# Altium PCB BPC_PWR_v1.1_Panel.PCBDOC
Units mm, origin at the board's own origin, x right, y up, seen from the top; angles counter-clockwise.
Board outline 380 x 230 mm, 4 copper layers (L1 - Top, L2 - GND, L3 - GND, L4 - Bottom), stack 1.564 mm thick; 12 components, 120 nets, 12 pads, 0 vias.
Unrouted connection lines stored in the file: 6.
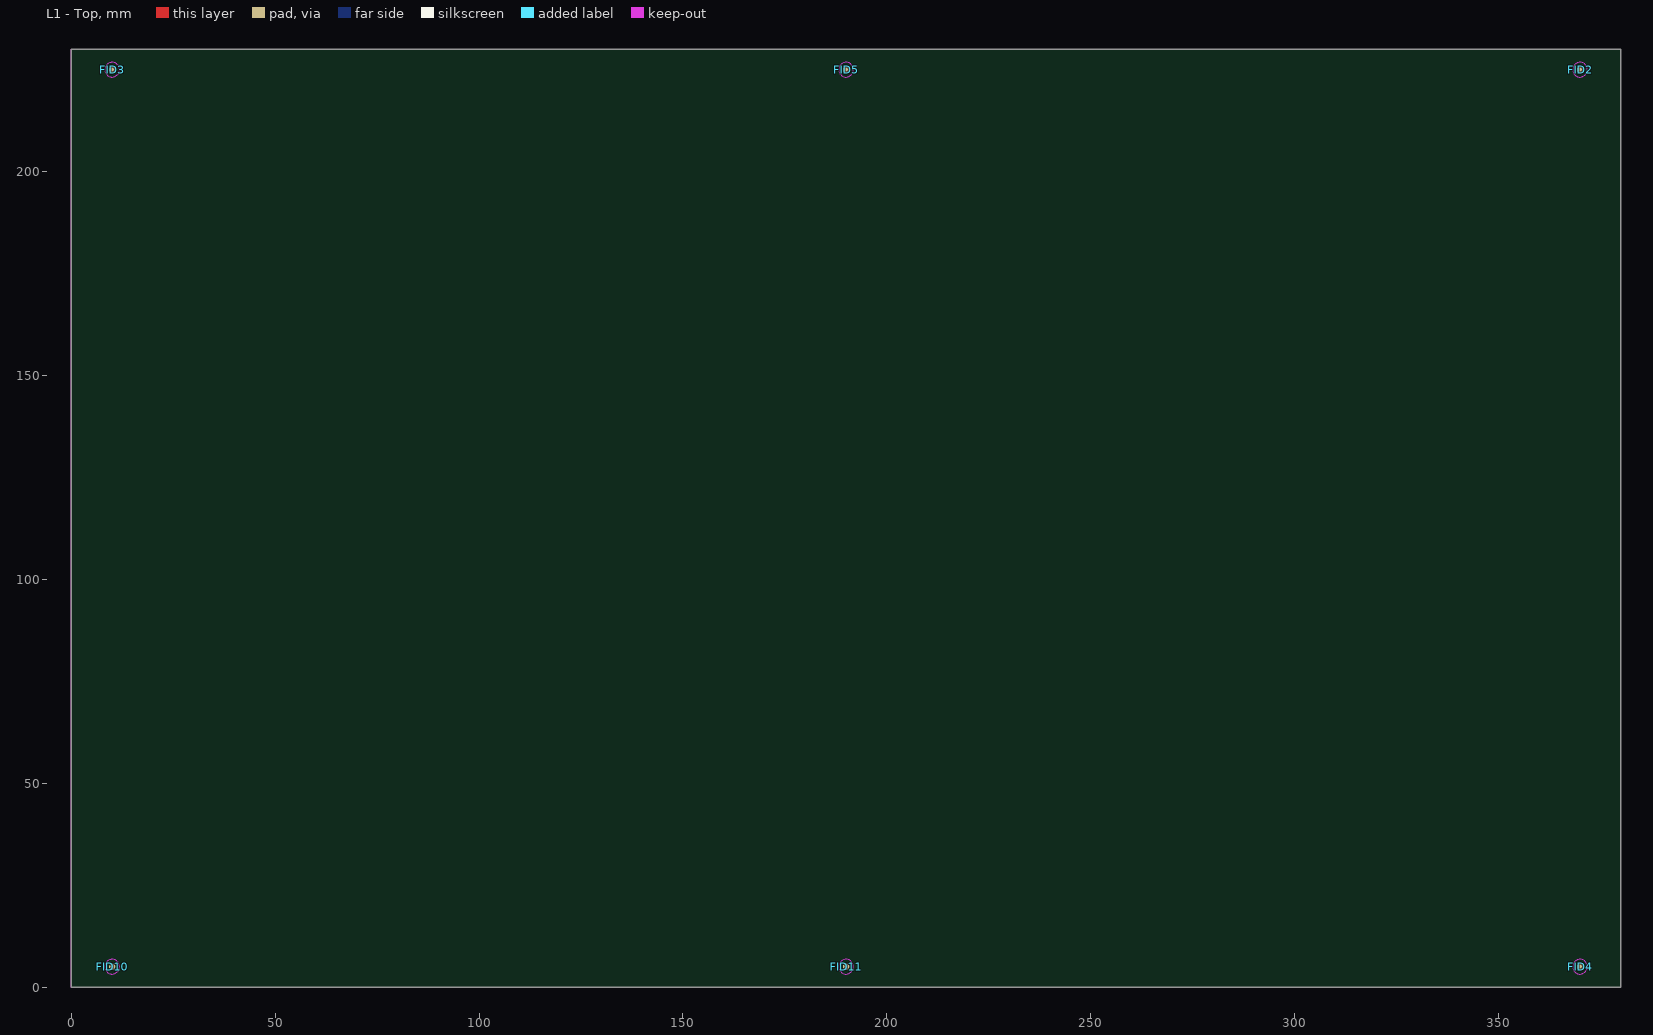
[diagram p0: L1 - Top view]
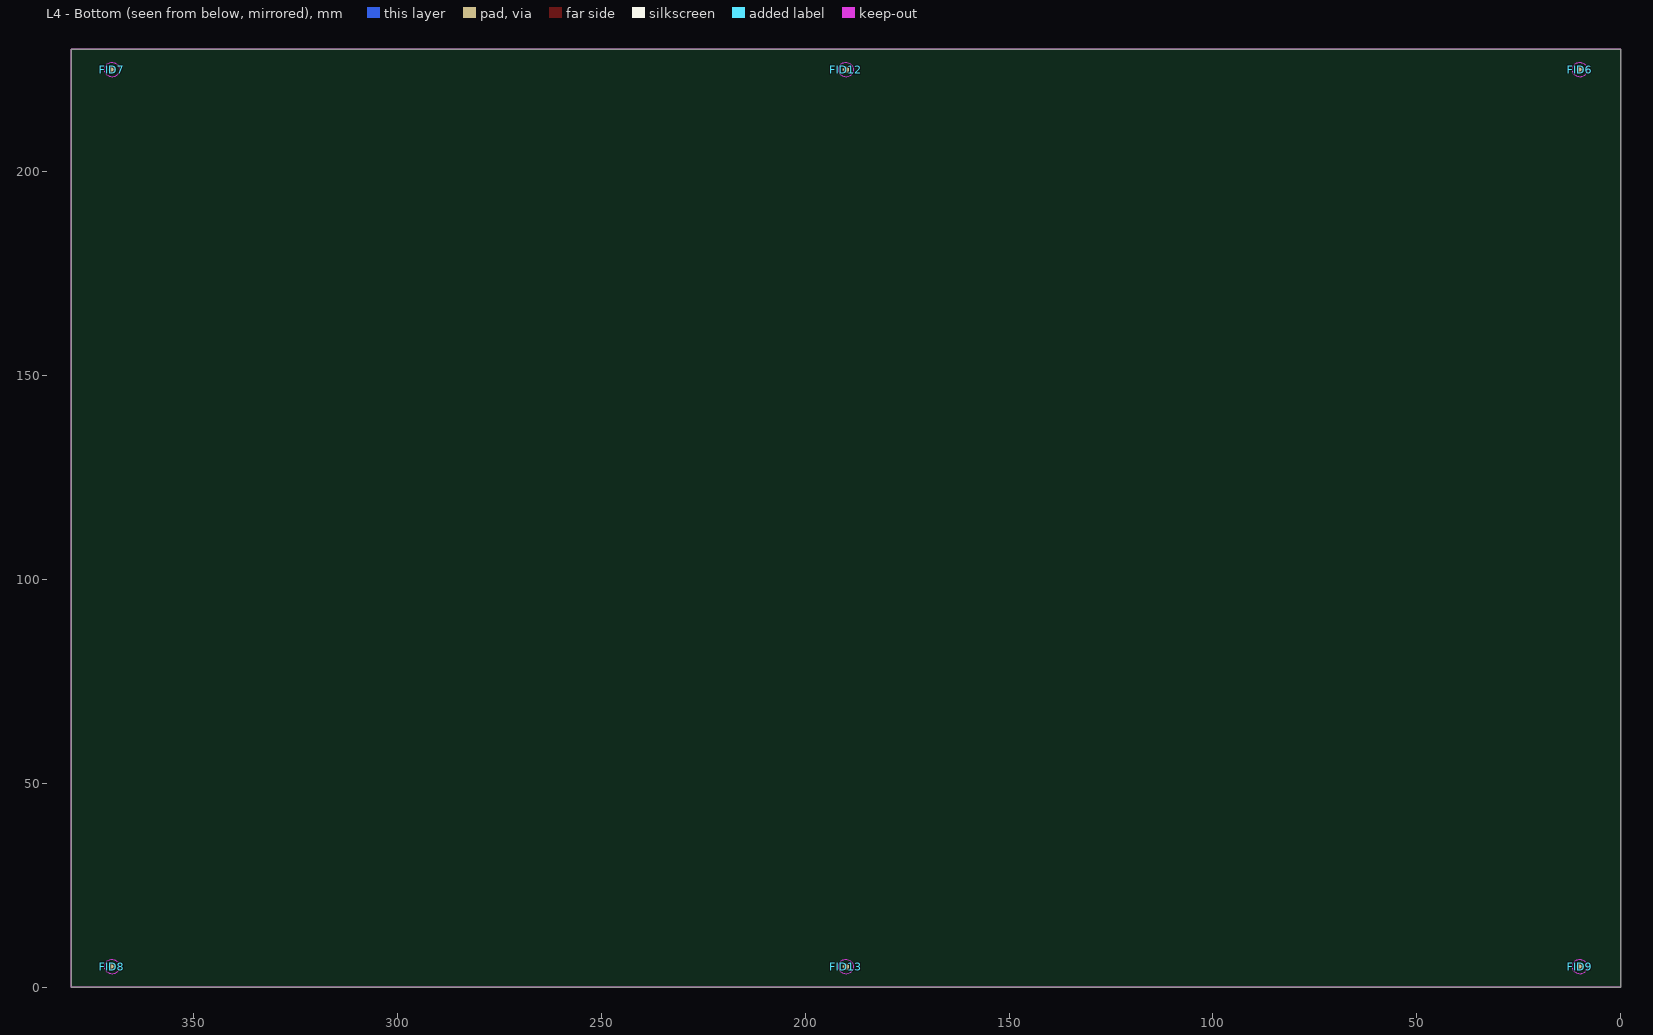
[diagram p1: L4 - Bottom view, seen from below]

## Layer stack, top to bottom
Top Solder: solder mask 0.015, Solder Resist, Dk 3.8
L1 - Top: signal copper 0.035
Dielectric1: prepreg 0.0994, FR-4, Dk 4.05
L2 - GND: signal copper 0.0152
Dielectric2: core 1.265, FR-4, Dk 4.6
L3 - GND: signal copper 0.0152
Dielectric3: prepreg 0.0994, FR-4, Dk 4.05
L4 - Bottom: signal copper 0.035
Bottom Solder: solder mask 0.015, Solder Resist, Dk 3.8

## Board outline
0,0 380,0 380,230 0,230

## Design rules (kind name [scope] priority, off if disabled: settings)
BoardOutlineClearance [All] p1: gap=0.25 ignorepadtopadclearanceinfootprint=FALSE except(0: Arc-SplitContinuation Track-SplitContinuation SMDPad-SplitContinuation THPad-SplitContinuation Via-SplitContinuation Fill-SplitContinuation Poly-SplitContinuation Region-SplitContinuation Text-SplitContinuation)
Clearance Clearance_TH-DSBGA [HasFootprint('DSBGA-12')] p1: gap=0.15 ignorepadtopadclearanceinfootprint=FALSE except(0: Arc-Hole Track-Hole SMDPad-Hole THPad-Hole Via-Hole Fill-Hole Poly-Hole Region-Hole Text-Hole)
Clearance Clearance_TOP_BOT_Poly [All vs OnBottomLayer or OnTopLayer] p2: gap=0.18 ignorepadtopadclearanceinfootprint=TRUE except(0: Arc-Hole Track-Hole SMDPad-Hole THPad-Hole Via-Hole Fill-Hole Poly-Hole Region-Hole Text-Hole; 0.165: Track-Track; 0.3: Arc-Poly Track-Poly SMDPad-Poly THPad-Poly Via-Poly Fill-Poly Poly-Poly)
Clearance "Clearance - Keep-out to Edge" [OnLayer('Keep-Out Layer') vs InPolygon] p3: gap=0.254 ignorepadtopadclearanceinfootprint=TRUE
Clearance "Clearance - Default - DEFAULT - Net" [All] p4: gap=0.2 ignorepadtopadclearanceinfootprint=TRUE except(0: Arc-Hole Track-Hole SMDPad-Hole THPad-Hole Via-Hole Fill-Hole Poly-Hole Region-Hole Text-Hole)
Clearance Clearance-xPP-xTP-xTT [All] p5: gap=0.15 ignorepadtopadclearanceinfootprint=FALSE except(0: Arc-Hole Track-Hole SMDPad-Hole THPad-Hole Via-Hole Fill-Hole Poly-Hole Region-Hole Text-Hole)
ComponentClearance "ComponentClearance - Default - DEFAULT" [All] p1: gap=0.14 collisioncheckmode=3 verticalgap=0.254 showdistances=FALSE
DiffPairsRouting DiffPair_CAN2 [InDifferentialPair('CAN2')] p1: maxlimit=0.203 minlimit=0.203 mostfreqgap=0.203 toplayer_minwidth=0.122 toplayer_maxwidth=0.122 toplayer_prefwidth=0.122 midlayer1_minwidth=0.122 midlayer1_maxwidth=0.122 midlayer1_prefwidth=0.122 midlayer2_minwidth=0.122 midlayer2_maxwidth=0.122 midlayer2_prefwidth=0.122 bottomlayer_minwidth=0.122 bottomlayer_maxwidth=0.122 bottomlayer_prefwidth=0.122 maxuncoupledlength=0
DiffPairsRouting [All] p2: maxlimit=0.25 minlimit=0.25 mostfreqgap=0.25 toplayer_minwidth=0.381 toplayer_maxwidth=0.381 toplayer_prefwidth=0.381 midlayer1_minwidth=0.381 midlayer1_maxwidth=0.381 midlayer1_prefwidth=0.381 midlayer2_minwidth=0.381 midlayer2_maxwidth=0.381 midlayer2_prefwidth=0.381 bottomlayer_minwidth=0.381 bottomlayer_maxwidth=0.381 bottomlayer_prefwidth=0.381 maxuncoupledlength=12.5
FanoutControl Fanout_Small [(CompPinCount < 5)] p1: bgadir=Out bgaviamode=Centered fanoutstyle=Auto fanoutdirection=OutThenIn viagrid=0.025 // Fanout_Small (Default Rule)
FanoutControl Fanout_BGA [IsBGA] p2: bgadir=Out bgaviamode=Centered fanoutstyle=Auto fanoutdirection=Alternating viagrid=0.025 // Fanout_BGA (Default Rule)
FanoutControl Fanout_LCC [IsLCC] p3: bgadir=Out bgaviamode=Centered fanoutstyle=Auto fanoutdirection=Alternating viagrid=0.025 // Fanout_LCC (Default Rule)
FanoutControl Fanout_SOIC [IsSOIC] p4: bgadir=Out bgaviamode=Centered fanoutstyle=Auto fanoutdirection=Alternating viagrid=0.025 // Fanout_SOIC (Default Rule)
Height [All] p1: minheight=0 maxheight=25 prefheight=12.5
HoleSize HoleSize-PTH [All] p1: absolutevalues=TRUE maxlimit=3 minlimit=0.25 maxpercent=80.000 minpercent=20.000
HoleToHoleClearance [All] p1: gap=0.35 allowstackedmicrovias=TRUE
Length "Default Length" [All] p1: maxlimit=1270 minlimit=0
MatchedLengths [InFromToClass('JTAG')] p1: tolerance=0.127 checknetsindiffpair=FALSE checkdiffpairvsdiffpair=TRUE checkxsignals=TRUE checkothers=TRUE
MatchedLengths DiffPair_DIF100MatchedLengths [InDifferentialPairClass('DIFF100')] p2: tolerance=0.127 checknetsindiffpair=TRUE checkdiffpairvsdiffpair=FALSE checkxsignals=FALSE checkothers=FALSE
MaxMinImpedance "Default Impedance" [All] p1: minimum=50.00 maximum=150.0
MinimumAnnularRing "Minimum IAR  >0.45mm" [((ObjectKind = 'Pad') OR (ObjectKind = 'Via')) And (Layer = 'MultiLayer') And (HoleDiameter > AsMM(0.45))] p1: minimumring=0.15 // minimum inner annular ring for pads > 0.45mm finished hole size
MinimumAnnularRing "Minimum IAR <=0.45mm" [((ObjectKind = 'Pad') OR (ObjectKind = 'Via')) And (Layer = 'MultiLayer') And (HoleDiameter <= AsMM(0.45))] p2: minimumring=0.15 // minimum inner annular ring for pads <= 0.45mm finished hole size
MinimumSolderMaskSliver [All] p1: minsoldermaskwidth=0.08
ParallelSegment "Default Parallel Segment Adjasent" [All] p1: limit=25.4 gap=5.08
ParallelSegment "Default Parallel Segment Same Layer" [All] p2: limit=25.4 gap=5.08
PlaneClearance PlaneClearance-IPI [All] p1: clearance=0.25
PlaneClearance [All] p2: clearance=0.12
PlaneConnect [All] p1: planeconnectstyle=Relief reliefexpansion=0.175 reliefentries=4 reliefconductorwidth=0.2 reliefairgap=0.2
PlaneConnect "Default PlaneConnect" [All] p2: planeconnectstyle=Direct reliefexpansion=0.508 reliefentries=4 reliefconductorwidth=0.254 reliefairgap=0.254
PolygonConnect PolygonConnect_DirectCONN [InPadClass('Direct_CONN')] p1: connectstyle=Direct reliefconductorwidth=0.254 reliefentries=4 polygonreliefangle="90 Angle" airgapwidth=0.254
PolygonConnect PolygonConnect_relief_top [IsNamedPolygon('15V_LC_L1') or IsNamedPolygon('15V_DCDC_L1') or IsNamedPolygon('15V_L1') or IsNamedPolygon('15V_OUT_L1') or IsNamedPolygon('3V6_DCDC_L1') or IsNamedPolygon('GND_PE_DOWN_L1') or IsNamedPolygon('GND_PE_DOWN_L4') or IsNamedPolygon('GND_24V_L1') or IsNamedPolygon('GND_24V_L4') or IsNamedPolygon('GND_-IN_L1') or IsNamedPolygon('GND_-IN_L4') or IsNamedPolygon('GND_PE_UP_L1') or IsNamedPolygon('GND_L1_Whole') or IsNamedPolygon('GND_L4_Whole') or IsNamedPolygon('TS_UP_Izvlakac') or IsNamedPolygon('GND_L3_Whole') or IsNamedPolygon('3V3_L4') or IsNamedPolygon('3V6_L1') vs (IsVia and (ViaDiameter=0.62)) or IsPad] p2: connectstyle=Relief reliefconductorwidth=0.254 reliefentries=4 polygonreliefangle="90 Angle" airgapwidth=0.254
PolygonConnect PolygonConnect_relief_top_1 [IsNamedPolygon ('TS_UP_Izvlakac') or IsNamedPolygon('GND_L3_Whole')  or IsNamedPolygon('GND_L1_Whole') or IsNamedPolygon('GND_L4_Whole') vs (IsVia and (ViaDiameter=0.6)) or IsPad] p3: connectstyle=Relief reliefconductorwidth=0.254 reliefentries=4 polygonreliefangle="90 Angle" airgapwidth=0.254
PolygonConnect PolygonConnect_Direct_Via_0.61 [IsNamedPolygon('GND_-IN_L1') or  IsNamedPolygon('GND_-IN_L2') or  IsNamedPolygon('GND_-IN_L3') or IsNamedPolygon('GND_-IN_L4') or  IsNamedPolygon('GND_L1_Whole') or IsNamedPolygon('GND_L2_Whole') or IsNamedPolygon('GND_L3_Whole') or IsNamedPolygon('GND_L4_Whole') or   IsNamedPolygon('3V3_L4') or IsNamedPolygon('3V3_L4_3') vs (IsVia and (ViaDiameter=0.6)) or IsPad] p4: connectstyle=Relief reliefconductorwidth=0.2 reliefentries=4 polygonreliefangle="90 Angle" airgapwidth=0.2
PolygonConnect "PolygonConnect - Default SMT" [IsSMTPin] p5: connectstyle=Direct reliefconductorwidth=0.254 reliefentries=4 polygonreliefangle="45 Angle" airgapwidth=0.152
PolygonConnect "PolygonConnect - Default Pad" [All] p6: connectstyle=Direct reliefconductorwidth=0.1 reliefentries=4 polygonreliefangle="45 Angle" airgapwidth=0.1
RoutingCorners [All] p1: cornerstyle=45-Degree minsetback=2.5 maxsetback=2.5
RoutingLayers "RoutingLayers - Default - DEFAULT" [All] p1: top layer_v5=TRUE mid layer 1_v5=TRUE mid layer 2_v5=TRUE bottom layer_v5=TRUE
RoutingPriority "RoutingPriority - Default - DEFAULT" [All] p1: routingpriority=3
RoutingTopology "Default Routing Topology" [All] p2: topology=Shortest
RoutingVias "RoutingVias > 0.45mm" [(ObjectKind = 'Via') And (HoleDiameter > AsMM(0.45))] p1: holewidth=0.5 width=0.85 viastyle="Through Hole" minholewidth=0.3 minwidth=0.6 maxholewidth=0.9 maxwidth=1.25 // finishet hole size > 0.45mm
RoutingVias "RoutingVias <= 0.45mm" [(ObjectKind = 'Via') And (HoleDiameter <= AsMM(0.45))] p2: holewidth=0.3 width=0.65 viastyle="Through Hole" minholewidth=0.25 minwidth=0.6 maxholewidth=0.45 maxwidth=0.8 // finishet hole size <= 0.45mm
SMDToCorner "SMDToCorner - Default - DEFAULT" [All] p1: distance=19685
SilkToSilkClearance [All] p1: silktosilkclearance=0.01
SilkToSolderMaskClearance [IsPad] p1: minsilkscreentomaskgap=0.05 clearancetoexposedcopper=TRUE
SolderMaskExpansion [All] p1: expansion=0 istentingtop=FALSE
UnRoutedNet [All] p1: checkbadconnections=TRUE
Width "Width - Net - GND" [InNet('GND') or InNet('GND_PE') or InNet('GND_READOUT') or InNet('GND_SS')] p1: maxlimit=4 minlimit=0.2 preferedwidth=0.3 minimp=50.000000 maximp=50.000000 favimp=50.000000
Width "Width - Net - PWR" [InNet('+15V') or InNet('+15V_L') or InNet('+15V_READOUT') or InNet('+15V_READOUT_FUSE') or InNet('+15V_SS') or InNet('+15V_SS_CONN') or InNet('+15V_SS_FUSE') or InNet('+15V_SS_FUSE1') or InNet('+3V3') or InNet('+3V3_READOUT') or InNet('+3V3_SS') or InNet('+V3P3OUT')] p2: maxlimit=4 minlimit=0.2 preferedwidth=0.3 minimp=50.000000 maximp=50.000000 favimp=50.000000
Width "Default Width" [All] p3: maxlimit=4 minlimit=0.147 preferedwidth=0.147 minimp=50.000000 maximp=50.000000 favimp=50.000000
12 further rules are at their usual default settings.

## Classes and differential pairs
net class KADR_FIL[0..3]: KADR_FIL0 KADR_FIL1 KADR_FIL2 KADR_FIL3
component class DCDC: HW? ms
differential pair CAN2: +CAN2_P -CAN2_N

## Components (designator, comment, footprint, x,y, rotation, side; value= is the part's Value field where it differs from the comment)
FID2 "Fiducial Mark Round 1.6mm" FIDUCIAL_3.2_1.6 370.025,225 r0 top
FID3 "Fiducial Mark Round 1.6mm" FIDUCIAL_3.2_1.6 10.025,225 r0 top (schematic designator FID2)
FID4 "Fiducial Mark Round 1.6mm" FIDUCIAL_3.2_1.6 370.025,5 r0 top (schematic designator FID2)
FID5 "Fiducial Mark Round 1.6mm" FIDUCIAL_3.2_1.6 190.025,225 r0 top (schematic designator FID2)
FID6 "Fiducial Mark Round 1.6mm" FIDUCIAL_3.2_1.6 10.025,225 r180 bottom (schematic designator FID2)
FID7 "Fiducial Mark Round 1.6mm" FIDUCIAL_3.2_1.6 370.025,225 r180 bottom (schematic designator FID2)
FID8 "Fiducial Mark Round 1.6mm" FIDUCIAL_3.2_1.6 370.025,5 r180 bottom (schematic designator FID2)
FID9 "Fiducial Mark Round 1.6mm" FIDUCIAL_3.2_1.6 10.025,5 r180 bottom (schematic designator FID2)
FID10 "Fiducial Mark Round 1.6mm" FIDUCIAL_3.2_1.6 10.025,5 r0 top (schematic designator FID2)
FID11 "Fiducial Mark Round 1.6mm" FIDUCIAL_3.2_1.6 190.025,5 r0 top (schematic designator FID2)
FID12 "Fiducial Mark Round 1.6mm" FIDUCIAL_3.2_1.6 190.025,225 r180 bottom (schematic designator FID2)
FID13 "Fiducial Mark Round 1.6mm" FIDUCIAL_3.2_1.6 190.025,5 r180 bottom (schematic designator FID2)

## Footprints (in the part's own frame and the unit in brackets; to place one, negate y for a bottom-side part, rotate by r counter-clockwise, add the part's x,y. Pads: shape width x height; smd on the part's side, far side on the other; paste and mask are expansions set on the pad)
FIDUCIAL_3.2_1.6 [mil]
  round 63 smd paste-31.5 mask+31.5: 0(0,0)
  L1 - Top keep-out circle w10: c0,0 r70.87

## Part data
FID2 FID3 FID4 FID5 FID6 FID7 FID8 FID9 FID10 FID11 FID12 FID13: library part "Fiducial 1.6mm Round MS", Package=N/A, Last Revision Date=27.11.2020., Mounting=N/A

## Nets (pads, with @x,y where several pads share a name; then routed paths per layer and width w, separated by ;. In a path a pad name is that pad's centre, name@x,y a point inside that pad or via, vN(x,y) a via of type N, cw(c..) or ccw(c..) an arc to the next point about the centre after c; other vN are vias at no path point)
+3V3: 
+3V6: 
+3V6_DCDC: 
+3V6_DCDC_SW: 
+15V: 
+15V_DCDC: 
+15V_LC: 
+15V_OUT: 
+24V: 
+24V_+IN: 
+24V_CMCK: 
+24V_DIO: 
+24V_FIL_L: 
+24V_FUSE: 
+24V_L: 
+24V_SW: 
+In: 
-In: 
/24V_PRESENT: 
/ALERT_PWR: 
/FLTB: 
/FT_VICOR: 
/PWR_GOOD_TPS: 
BLEEDER_ON_OFF: 
BOOT0: 
CAN2_N: 
CAN2_P: 
CAN_FAULT: 
DCAN_RX: 
DCAN_TX: 
EN: 
FB_3V6: 
FT: 
GATE: 
GND: 
GND_24V: 
GND_-IN: 
GND_PE_DOWN: 
GND_PE_UP: 
KADR0: 
KADR1: 
KADR2: 
KADR3: 
KADR_FIL0: 
KADR_FIL1: 
KADR_FIL2: 
KADR_FIL3: 
LED_ERR: 
LED_PWR_OK: 
LED_RUN: 
NetC4_2: 
NetC5_2: 
NetC6_2: 
NetC13_1: 
NetC13_2: 
NetC36_1: 
NetC36_2: 
NetC49_1: 
NetC50_1: 
NetC51_2: 
NetC52_1: 
NetC53_2: 
NetC60_2: 
NetC79_2: 
NetC80_1: 
NetC80_2: 
NetC81_1: 
NetC81_2: 
NetC82_2: 
NetC84_1: 
NetD3_K: 
NetD4_K: 
NetD11_A: 
NetD12_A: 
NetD12_K: 
NetFB1_2: 
NetFB2_2: 
NetL5_2: 
NetLED1_A: 
NetLED4_K: 
NetLED_ERR1_K: 
NetLED_RUN1_K: 
NetQ2_3: 
NetQ3_3: 
NetQ4_3: 
NetQ5_1: 
NetQ5_3: 
NetQ6_1: 
NetQ6_3: 
NetR14_1: 
NetR29_1: 
NetR41_2: 
NetR80_1: 
NetR81_1: 
NetR88_2: 
NetRT1_2: 
nRST: 
nTEMP_ALERT: 
OV: 
PC14_OSC32_IN: 
PC15_OSC32_OUT: 
PF0_OSC_IN: 
PF1_OSC_OUT: 
PG_3V3: 
SCL: 
SDA: 
STAT: 
SYS_SWCLK: 
SYS_SWDIO: 
TEMP_ANALOG_SENSOR: 
TR: 
UART_CTS: 
UART_CTS_232: 
UART_RTS: 
UART_RTS_232: 
UART_RX: 
UART_RX_232: 
UART_TX: 
UART_TX_232: 
UV: 
pads on no net: FID2.0 FID3.0 FID4.0 FID5.0 FID6.0 FID7.0 FID8.0 FID9.0 FID10.0 FID11.0 FID12.0 FID13.0

## Keep-outs
KeepOutLayer:
  the board outline again, w0.2

## Silkscreen, mask and mechanical layers (free items; w line width, h text height)
Instructions (V-Cut):
  lines w0.2: -3.825,109.95 -0.95,109.95 ; -3.8,220 -0.925,220 ; -3.725,120.025 -0.85,120.025 ; -3.525,9.975 -0.65,9.975 ; -1.55,109.625 -0.95,109.95 ; -1.55,110.25 -0.95,109.95 ; -1.525,219.675 -0.925,220 ; -1.525,220.3 -0.925,220 ; -1.45,119.7 -0.85,120.025 ; -1.45,120.325 -0.85,120.025 ; -1.25,9.65 -0.65,9.975 ; -1.25,10.275 -0.65,9.975 ; 0,10 380,10 ; 0,110 380,110 ; 0,120 380,120 ; 0,220 380,220 ; 19.7,-0.925 20,-0.325 ; 20,-3.2 20,-0.325 ; 20,0 20,230 ; 20.325,-0.925 20,-0.325 ; 179.75,-1.15 180.05,-0.55 ; 180,0 180,230 ; 180.05,-3.425 180.05,-0.55 ; 180.375,-1.15 180.05,-0.55 ; 199.7,-1.325 200,-0.725 ; 200,-3.6 200,-0.725 ; 200,0 200,230 ; 200.325,-1.325 200,-0.725 ; 359.7,-1.175 360,-0.575 ; 360,-3.45 360,-0.575 ; 360,0 360,230 ; 360.325,-1.175 360,-0.575
  text "V-Cut" at -11.409,219.229 h3
  text "V-Cut" at -11.334,119.254 h3
  text "V-Cut" at -11.434,109.179 h3
  text "V-Cut" at -11.134,9.204 h3
  text "V-Cut" at 16.525,-5.342 h3
  text "V-Cut" at 176.575,-5.567 h3
  text "V-Cut" at 356.525,-5.592 h3
  text "V-Cut" at 196.525,-5.742 h3
Panel Details:
  lines w0: 421.786,181.863 423.691,181.863
  lines w0.2: 421.786,164.353 423.756,166.193 ; 421.786,166.193 423.691,164.353 ; 421.786,171.353 423.756,173.193 ; 421.786,173.193 423.691,171.353 ; 421.786,174.863 423.756,176.703 ; 421.786,176.703 423.691,174.863 ; 421.786,181.863 423.756,183.703 ; 421.786,183.703 423.691,181.863 ; 421.786,185.353 423.756,187.193 ; 421.786,187.193 423.691,185.353
  lines w0.508: 421.916,160.863 421.786,160.863 ; 421.916,164.353 421.786,164.353 ; 421.916,167.863 421.786,167.863 ; 421.916,171.353 421.786,171.353 ; 421.916,174.863 421.786,174.863 ; 421.916,178.353 421.786,178.353 ; 421.916,181.863 421.786,181.863 ; 421.916,187.193 421.786,187.193 ; 423.626,160.863 423.756,160.863 ; 423.626,164.353 423.756,164.353 ; 423.626,167.863 423.756,167.863 ; 423.626,171.353 423.756,171.353 ; 423.626,174.863 423.756,174.863 ; 423.626,178.353 423.756,178.353 ; 423.626,181.863 423.756,181.863 ; 421.786,160.863 421.786,162.703 423.756,162.703 423.756,160.863 ; 421.786,160.863 423.756,160.863 ; 421.786,164.353 421.786,166.193 423.756,166.193 423.756,164.353 ; 421.786,164.353 423.756,164.353 ; 421.786,167.863 421.786,169.703 423.756,169.703 423.756,167.863 ; 421.786,167.863 423.756,167.863 ; 421.786,171.353 423.756,171.353 ; 421.786,171.353 421.786,173.193 423.756,173.193 423.756,171.353 ; 421.786,174.863 423.756,174.863 ; 421.786,174.863 421.786,176.703 423.756,176.703 423.756,174.863 ; 421.786,178.353 423.756,178.353 ; 421.786,178.353 421.786,180.193 423.756,180.193 423.756,178.353 ; 421.786,181.863 423.756,181.863 ; 421.786,181.863 421.786,183.703 423.756,183.703 423.756,181.863 ; 421.786,187.193 423.756,187.193 423.756,185.353 421.786,185.353 421.786,187.193
  text "Panel PCB, ToDo list:" at 421.331,190.032 h5
  text "Hide single PCB mechanical layers" at 426.466,185.583 h2.5
  text "Board outline in the BoardOutline layer" at 426.466,182.093 h2.5
  text "Panel type in the BoardOutline layer" at 426.466,178.583 h2.5
  text "Dimensions in the Panel Dimension layer" at 426.466,175.093 h2.5
  text "Fiducials" at 426.466,171.583 h2.5
  text "Layer Markings in Copper Layers" at 426.466,168.093 h2.5
  text "Stackup Legend in the Panel PCB Assembly Notes layer" at 426.466,164.583 h2.5
  text "Gerber Identification in the GerberIDPanel layer." at 426.466,161.093 h2.5
Panel PCB Assembly Notes:
  drawing of 196 lines, arcs and shapes, not listed
  text "Layer" at 429.623,126.573 h1.52
  text "Name" at 436.222,126.573 h1.52
  text "Material" at 449.3,126.573 h1.52
  text "Thickness" at 460.999,126.573 h1.52
  text "Constant" at 470.62,126.573 h1.52
  text "Board Layer Stack" at 479.496,126.573 h1.52
  text "Top Overlay" at 436.222,123.525 h1.52
  text "Top Solder" at 436.222,120.477 h1.52
  text "Solder Resist" at 449.3,120.477 h1.52
  text "0.59mil" at 460.999,120.477 h1.52
  text "3.8" at 470.62,120.477 h1.52
  text "1" at 429.623,117.429 h1.52
  text "L1 - Top" at 436.222,117.429 h1.52
  text "1.38mil" at 460.999,117.429 h1.52
  text "Dielectric1" at 436.222,114.381 h1.52
  text "FR-4" at 449.3,114.381 h1.52
  text "3.91mil" at 460.999,114.381 h1.52
  text "4.05" at 470.62,114.381 h1.52
  text "2" at 429.623,111.333 h1.52
  text "L2 - GND" at 436.222,111.333 h1.52
  text "0.60mil" at 460.999,111.333 h1.52
  text "Dielectric2" at 436.222,108.285 h1.52
  text "FR-4" at 449.3,108.285 h1.52
  text "49.80mil" at 460.999,108.285 h1.52
  text "4.6" at 470.62,108.285 h1.52
  text "3" at 429.623,105.237 h1.52
  text "L3 - GND" at 436.222,105.237 h1.52
  text "0.60mil" at 460.999,105.237 h1.52
  text "Dielectric3" at 436.222,102.189 h1.52
  text "FR-4" at 449.3,102.189 h1.52
  text "3.91mil" at 460.999,102.189 h1.52
  text "4.05" at 470.62,102.189 h1.52
  text "4" at 429.623,99.141 h1.52
  text "L4 - Bottom" at 436.222,99.141 h1.52
  text "1.38mil" at 460.999,99.141 h1.52
  text "Bottom Solder" at 436.222,96.093 h1.52
  text "Solder Resist" at 449.3,96.093 h1.52
  text "0.59mil" at 460.999,96.093 h1.52
  text "3.8" at 470.62,96.093 h1.52
  text "Bottom Overlay" at 436.222,93.045 h1.52
  text "Top/Bottom Copper Thickness:" at 428.504,88.423 h2
  text "0.038mm after plating" at 458.825,88.35 h2
  text "1.594mm" at 458.829,85.473 h2
  text "Total Board Thickness:" at 428.544,85.443 h2
  text "ENIG" at 458.829,82.435 h2
  text "Surface Finish:" at 428.544,82.398 h2
  text "Solder Mask Color:" at 428.544,79.398 h2
  text "Green" at 458.829,79.398 h2
  text "Minimums:" at 428.829,71.398 h2
  text "0.15mm" at 458.829,68.428 h2
  text "Minimal Clearance:" at 428.829,68.398 h2
  text "Minimal Track Width:" at 428.829,65.398 h2
  text "0.122mm" at 458.869,65.313 h2
  text "Minimal Via Size:" at 428.829,62.398 h2
  text "0.6/0.3mm" at 458.829,62.398 h2
  text "0.3mm" at 458.829,59.428 h2
  text "Minimal Hole Size:" at 428.829,59.398 h2
  text "Impedance Control:" at 428.829,55.398 h2
  text "Single Ended Lines (Outer Layers):" at 428.904,52.757 h2
  text "0.147mm (50 ohm)" at 458.675,52.675 h2
  text "Diff Pair Width/Gap (Outer Layers):" at 428.954,49.748 h2
  text "0.122mm/0.203mm (100 ohm)" at 458.954,49.733 h2
  text "Layer M2" at 458.85,45.025 h2
  text "Board Outline:" at 429.249,45.001 h2
  text "V-Cut" at 429.225,41.875 h2
  text "Layer M1" at 458.85,41.875 h2
DrillDrawing:
  lines w0.381: 62.272,246.465 62.272,252.774 ; 68.434,246.465 68.434,252.774 ; 77.131,246.465 77.131,252.774 ; 83.416,246.465 83.416,252.774 ; 92.568,246.465 92.568,252.774 ; 105.085,246.465 105.085,252.774 ; 112.584,246.465 112.584,252.774 ; 122.38,246.465 122.38,252.774 ; 130.988,246.465 130.988,252.774 ; 140.826,246.465 140.826,252.774 ; 156.125,246.465 156.125,252.774 ; 171.013,246.465 171.013,252.774 ; 181.485,246.465 181.485,252.774 ; 54.165,246.465 198.64,246.465 198.64,252.774 54.165,252.774 54.165,246.465 ; 54.165,249.62 198.64,249.62 54.165,249.62
  text "Symbol" at 56.058,250.566 h1.83
  text "Count" at 63.218,250.566 h1.83
  text "Hole Size" at 69.381,250.566 h1.83
  text "Plated" at 78.077,250.566 h1.83
  text "Hole Type" at 84.363,250.566 h1.83
  text "Drill Layer Pair" at 93.514,250.566 h1.83
  text "Via/Pad" at 106.032,250.566 h1.83
  text "Pad Shape" at 113.53,250.566 h1.83
  text "Template" at 123.326,250.566 h1.83
  text "Description" at 131.934,250.566 h1.83
  text "Hole Tolerance (+)" at 141.773,250.566 h1.83
  text "Hole Tolerance (-)" at 157.071,250.566 h1.83
  text "Hole Length" at 171.959,250.566 h1.83
  text "Routed Path Length" at 182.432,250.566 h1.83
Single PCB Header:
  lines w0.127: -63.575,258.935 -55.955,258.935 ; 495.225,59.545 502.845,59.545 ; 495.225,159.24 502.845,159.24 ; 495.225,258.935 502.845,258.935
  text "A" at -60.4,306.738 h2.5
  text "A" at 498.4,306.738 h2.5
  text "B" at 498.4,206.916 h2.5
  text "C" at 498.4,107.348 h2.5
  text "D" at 498.4,7.526 h2.5
Panel PCB Header:
  drawing of 4544 lines, arcs and shapes, not listed
  text "1" at -27.811,335.886 h2.5
  text "6" at 326.028,335.886 h2.5
  text "7" at 397.148,335.886 h2.5
  text "8" at 467.76,335.886 h2.5
  text "PROJECT MANAGER:" at 383,-22.635 h1.5
  text "TITLE:" at 421.1,-22.635 h1.5
  text "PCB DESIGNER:" at 383,-30.128 h1.5
  text "DATE:" at 383,-37.875 h1.5
  text "PROJECT ID:" at 421.1,-37.875 h1.5
  text "REV:" at 474.44,-37.875 h1.5
  text ".PRINT_DATE" at 384.27,-40.923 h2.8
  text "FILE NAME:" at 383,-45.233 h1.5
  text "LAYER NAME:" at 441.489,-45.233 h1.5
  text ".PCB_FILE_NAME_NO_PATH" at 384.27,-48.543 h2.8
  text ".PRINTOUT_NAME" at 442.109,-48.543 h2.8
  text "7" at 397.148,-55.02 h2.5
  text "8" at 467.76,-55.02 h2.5

## Dimensions
0,0.254 to 380,-0.05 on Panel Dimensions
380,0 to 380,230 on Panel Dimensions

## Panel: embedded boards
"BPC_PWR_v1.1.PCBDOC" at 20,10, 2 rows x 2 columns, spacing 110 x 180, rotation 0